# EAGLE board APUC (EAGLE 7.2.0)
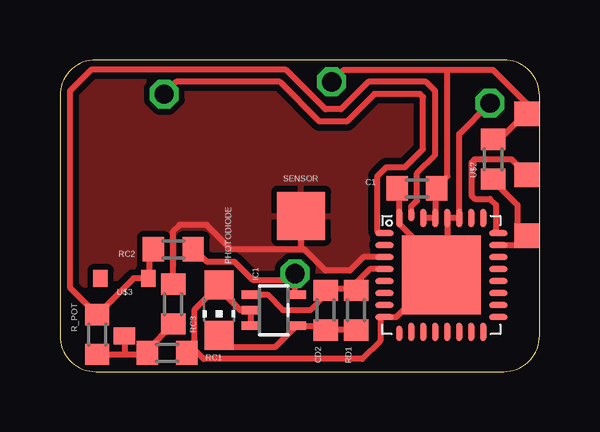
[diagram p0: board, top side]
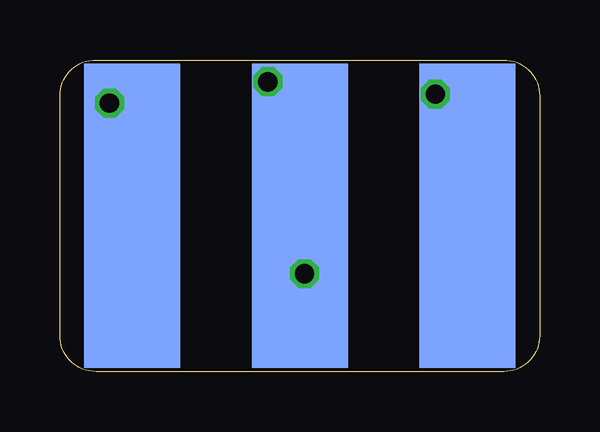
[diagram p1: board, bottom side, seen from below]

Size 20 x 13 mm. Coordinates in mm from the lower left corner, seen from the top.
Copper layers (1*16): Top 0.035mm / dielectric 1.5mm / Bottom 0.035mm
Design rules "Bilex DRU *": minimum track width 10mil, minimum drill 24mil, track to track 10mil, track to pad 10mil, pad to pad 10mil, via to via 10mil, smd to smd 10mil, copper to edge 1mil, drill to drill 8mil, minimum pad ring 10mil, minimum via ring 8mil, stop-mask expansion 4mil, vias tented up to drill 0mil, thermal gap 10mil

## Footprints (pad centres in the part's own frame; a part is rotated, then mirrored left to right if it is on the bottom)
603 = smd 0.889 x 1.016: 1 -0.826,0; 2 0.826,0
SC70-5 = smd 0.35 x 0.8: 1 -0.65,-0.95; 2 0,-0.95; 3 0.65,-0.95; 4 0.65,0.95; 5 -0.65,0.95
CHIP-LED0805 = smd 1.2 x 1.2: A 0,-1.05; C 0,1.05
TP20SQ = smd 2 x 2: TP 0,0
CARRIER_SMD2_3POL = smd 4 x 12.7 bottom: GND -6.985,0; RX/TX 6.985,0; VCC 0,0 | smd 1.016 x 1.016: RST -9.461,0.826; TST -9.461,-1.714; VCC'' -9.461,-4.255
MURATA-PVZ = smd 0.6 x 0.7: P$1 -1,-1.2; P$3 1,-1.2 | smd 0.9 x 0.7: P$2A 0,1.2
QFN32 = smd 0.762 x 0.254: 1 -2.375,1.75; 2 -2.375,1.25; 3 -2.375,0.75; 4 -2.375,0.25; 5 -2.375,-0.25; 6 -2.375,-0.75; 7 -2.375,-1.25; 8 -2.375,-1.75; 17 2.375,-1.75; 18 2.375,-1.25; 19 2.375,-0.75; 20 2.375,-0.25; 21 2.375,0.25; 22 2.375,0.75; 23 2.375,1.25; 24 2.375,1.75 | smd 0.254 x 0.635: 9 -1.75,-2.438 | smd 0.254 x 0.762: 10 -1.25,-2.375; 11 -0.75,-2.375; 12 -0.25,-2.375; 13 0.25,-2.375; 14 0.75,-2.375; 15 1.25,-2.375; 16 1.75,-2.375; 25 1.75,2.375; 26 1.25,2.375; 27 0.75,2.375; 28 0.25,2.375; 29 -0.25,2.375; 30 -0.75,2.375; 32 -1.75,2.375 | smd 0.254 x 0.508: 31 -1.25,2.5 | smd 3.302 x 3.302: TP 0,0

## Placement (x,y rotation side)
C1  100n  [603]  14.89,7.64 180 top
CD2  1p  [603]  11.08,2.56 90 top
IC1  AD8519KS  [SC70-5]  8.92,2.56 270 top
PHOTODIODE  [CHIP-LED0805]  6.63,2.56 180 top
R_POT  100k  [603]  1.55,1.54 270 top
RC1  100k  [603]  4.47,0.78 0 top
RC2  100k  [603]  4.73,5.1 180 top
RC3  1M  [603]  4.73,2.81 90 top
RD1  10M  [603]  12.35,2.56 90 top
SENSOR  TPTP20SQ  [TP20SQ]  10.06,6.5 0 top
U$1  CARRIER_SMD2SMD2_3POL  [CARRIER_SMD2_3POL]  10,6.5 180 top
U$2  10k  [603]  18.06,8.86 90 top
U$3  10k  [MURATA-PVZ]  2.7,2.69 180 top
U$10  MSP430G2553  [QFN32]  15.9,4.03 0 top

## Library data of the parts
C1 CD2 R_POT RC1-RC3 RD1 U$1-U$3 U$10 = thar
IC1 = analog-devices; OC_FARNELL: unknown; OC_NEWARK: unknown
PHOTODIODE = led
SENSOR = testpad

## Nets
COMP_A: RC3.2 SENSOR.TP U$10.3
COMP_B: R_POT.1 RC2.2 U$3.P$1 U$10.31
GND: C1.2 IC1.2 IC1.3 PHOTODIODE.A RC1.2 U$1.GND U$10.8 U$10.27 U$10.28 U$10.32 U$10.TP
LIGHT: CD2.2 IC1.1 RD1.2 U$10.4
N$3: U$1.TST U$10.24
N$4: U$1.RST U$2.1 U$10.23
N$5: CD2.1 IC1.4 PHOTODIODE.C RD1.1
N$12: U$1.RX/TX U$10.1
N$23: R_POT.2 RC1.1 RC3.1 U$3.P$2A
VCC: C1.1 IC1.5 RC2.1 U$1.VCC U$1.VCC'' U$2.2 U$10.29 U$10.30

## Tracks (layer width: path | path; a pad name or v marks a point on that pad's centre or on a via)
COMP_A
  Top 0.254: RC3.2 4.73,5.86 4.98,6.12 6.12,6.12 7.14,5.1 10.06,5.1 | U$10.3 12.66,4.78 12.09,4.21 11.08,4.21 10.19,5.1 10.06,5.1 | SENSOR.TP 10.06,5.1
  pour Top: 3.33,4.21 12.09,4.21 13.24,5.35 13.24,8.53 15.14,8.53 15.14,11.58 13.11,11.58 11.97,10.43 10.82,10.43 9.17,12.09 1.3,12.09 0.41,11.2 0.41,3.45 1.17,2.69 1.93,2.69
COMP_B
  Top 0.254: U$10.31 14.65,6.9 14.89,7.13 14.89,8.28 15.65,9.04 15.65,11.7 15.27,12.09 12.86,12.09 11.71,10.94 11.08,10.94 9.43,12.59 1.3,12.59 0.41,11.7 0.41,3.51 R_POT.1 3.07,3.89 U$3.P$1 3.71,3.9 3.71,5.23 RC2.2
GND  (via drill 0.8)
  Top 0.254: 16.43,4.35 16.19,5.38 16.16,5.35 | 16.43,4.35 16.48,3.06 U$10.TP 15.01,2.94 14.89,3.14 14.03,2.28 U$10.8 13.36,2.28 13.36,1.29 12.6,0.53 6,0.53 5.62,0.91 | 16.15,4.72 U$10.28 U$10.27 16.65,9.91 v17.93,11.2 | 16.15,4.72 16.15,4.42 16.43,4.35 | 16.15,4.72 15.52,5.35 14.76,5.55 14.15,6.16 U$10.32 14.15,7.49 14,7.46 14.12,7.58 C1.2 13.87,7.64 | 13.87,7.64 14.12,7.26 | 13.87,7.64 14.12,7.89 | IC1.3 IC1.2 7.52,2.56 6.63,3.45 PHOTODIODE.A 5.62,2.59 5.62,0.91 | RC1.2 5.49,0.78 5.62,0.91
  Bottom 0.254: 18,6.5 17.93,6.57 v17.93,11.2 17.93,7.45 U$1.GND
LIGHT
  Top 0.254: 12.61,3.64 RD1.2 12.35,3.58 | 12.35,3.58 12.35,3.7 12.92,4.28 U$10.4 | 12.35,3.58 12.22,3.45 11.14,3.45 CD2.2 11.08,3.2 10.44,2.56 9.3,2.56 8.65,3.21 IC1.1
N$3
  Top 0.254: 19.61,7.88 19.46,8.02 19.5,8.18 | U$10.24 18.19,5.78 18.19,6.95 17.93,7.21 17.3,7.21 17.17,7.33 17.17,8.73 17.3,8.86 18.82,8.86 19.5,8.18 | 19.5,8.18 U$1.TST
N$4
  Top 0.254: 19.46,5.48 19.5,5.38 | 19.46,5.48 19.5,5.69 | 19.5,5.69 19.08,5.74 19.08,6.95 18.06,7.97 U$2.1 | U$10.23 19.28,5.28 19.46,5.48 | 19.5,5.69 19.48,5.69 U$1.RST
N$5
  Top 0.254: RD1.1 CD2.1 11.03,1.91 IC1.4 8.99,1.04 6.76,1.04 6.63,1.16 PHOTODIODE.C
N$12  (via drill 0.8)
  Top 0.254: U$10.1 13.32,5.78 13.24,5.86 13.24,8.15 13.62,8.53 14.38,8.53 15.14,9.29 15.14,11.45 15.01,11.58 13.11,11.58 11.97,10.43 10.82,10.43 9.17,12.09 4.85,12.09 v4.35,11.58
  Bottom 0.254: U$1.RX/TX 4.35,7.83 v4.35,11.58
N$23
  Top 0.254: RC3.1 3.65,0.91 RC1.1 3.58,0.72 2.7,0.72 | U$3.P$2A 2.76,1.49 | R_POT.2 2.7,0.72 | 2.94,1.49 2.76,1.49 | 2.76,1.49 2.7,1.42 2.7,0.72
VCC  (via drill 0.8)
  Top 0.254: U$10.29 | U$10.29 15.65,8.02 15.78,8.02 | 15.9,7.77 15.84,8.02 | 15.84,8.02 15.78,8.02 | U$10.29 U$10.30 | C1.1 15.84,8.02 | 19.5,10.52 19.46,10.56 | U$2.2 18.12,9.48 19.2,10.56 19.2,10.51 19.46,10.56 | 19.62,10.98 19.65,10.95 19.65,10.75 19.46,10.56 | U$1.VCC'' 19.46,10.82 19.62,10.98 | 19.62,10.98 19.62,11.03 18.06,12.59 16.16,12.59 | IC1.5 9.7,3.21 9.81,3.2 v9.81,4.08 9.55,3.83 8.03,3.83 7.27,4.59 6.12,4.59 5.55,5.16 RC2.1 | 15.78,8.02 15.78,7.77 | 15.78,7.64 15.78,7.77 | 15.78,7.77 16.16,8.15 16.16,12.59 | v11.33,12.09 11.84,12.59 16.16,12.59
  Bottom 0.254: v11.33,12.09 11.33,7.83 U$1.VCC 9.55,6.05 v9.81,4.08